# Altium PCB 20bit_40MS_ADC_DIOT.PcbDoc (part 4 of 8)
Units mm, origin at the board's own origin, x right, y up, seen from the top; angles counter-clockwise.
Board outline 222.63 x 100.1 mm, 6 copper layers (L1, L2, L3, L4, L5, L6), stack 2.522 mm thick; 616 components, 374 nets, 2097 pads, 984 vias.
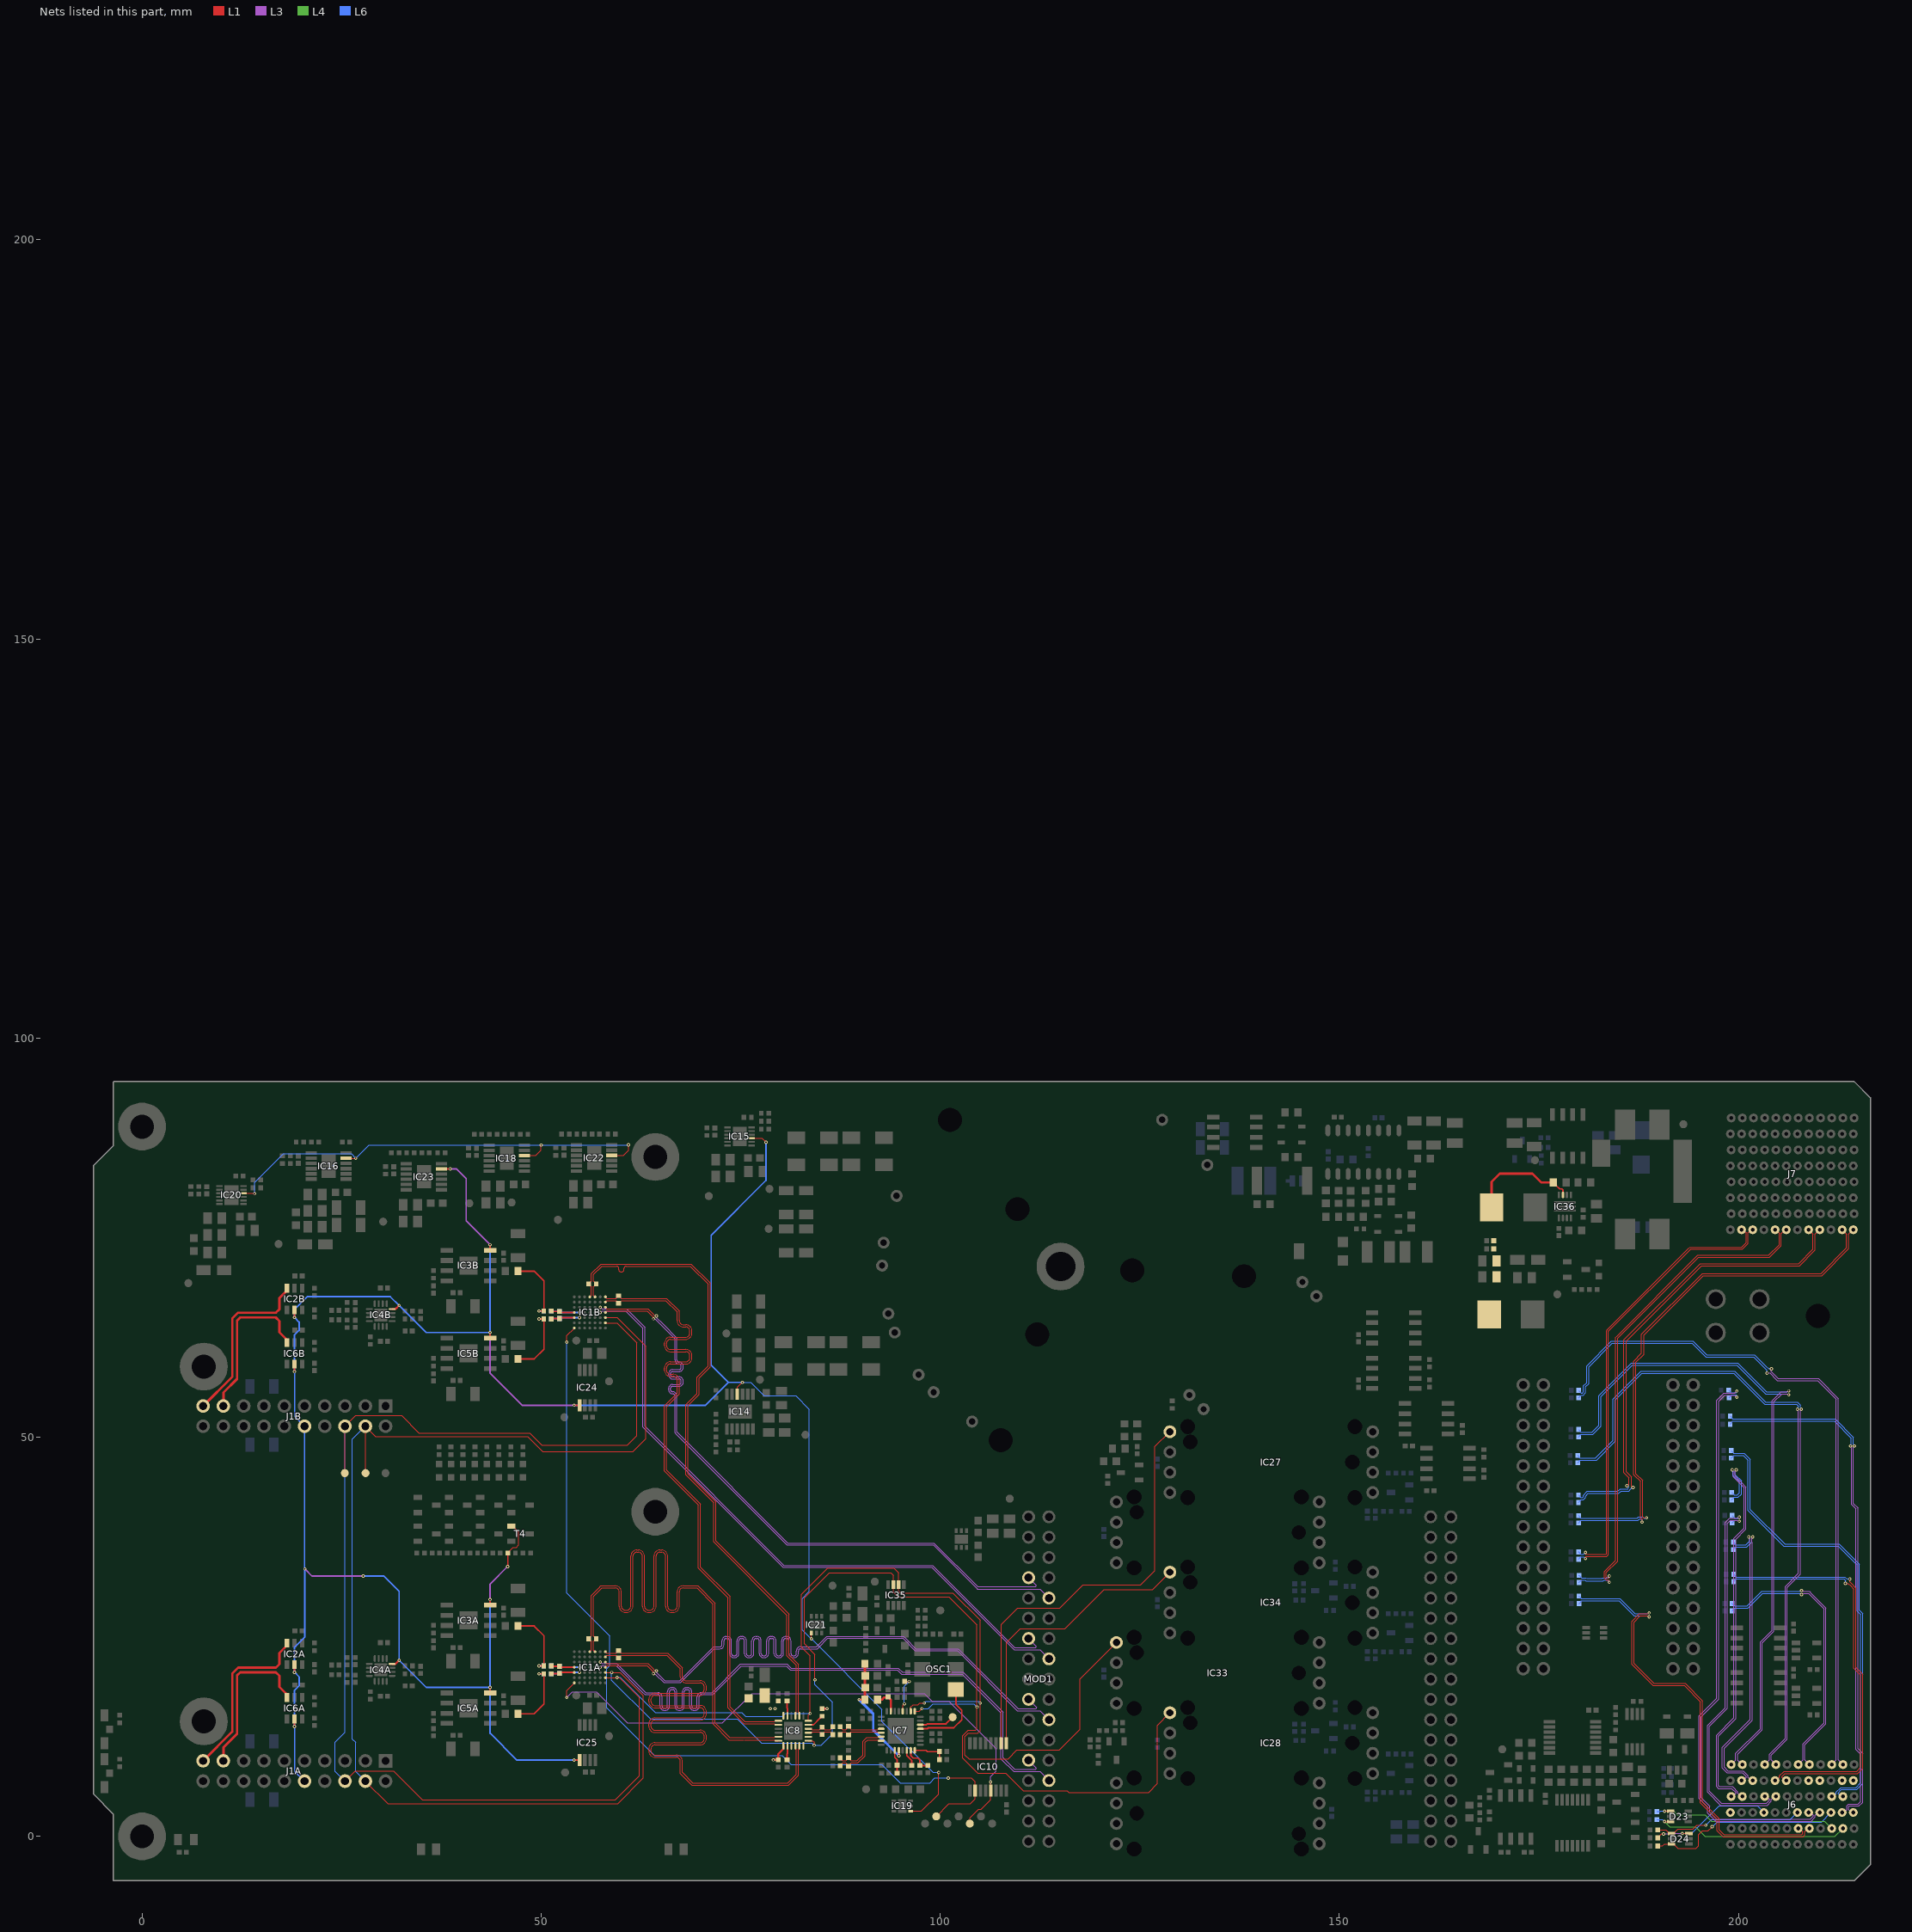
[diagram p7: the nets of this part, all layers, seen from the top]

## Part data (continued)
R128: library part R0603_49K9_1%_0.1W_100PPM, "Resistor - 1%", Case=0603, Manufacturer=GENERIC, Manufacturer1 ComponentHeight=0.55mm, Manufacturer1 Example=VISHAY, Manufacturer1 Part Number=CRCW060349K9FKEA, Power=0.1W, Tolerance=±1%, Author="CERN DEM JLC", Component Type=Standard, CreateDate=16.11.2017, HelpURL="\\cern.ch\dfs\Applications\Altium\Datasheets\R0603_VISHAY_CRCW e3.pdf", LatestRevisionDate=16.11.2017, Manufacturer Part Number=R0603_49K9_1%_0.1W_100PPM, Mounted=Yes, Part Description="General Purpose Thick Film Chip Resistor", Part Number=R0603_49K9_1%_0.1W_100PPM, Pin Count=2, PressFit=No, Sense=No, SMD=Yes, Socket=No, Status=Preferred, TC=±100ppm/°C
R129: library part R0603_150K_1%_0.1W_100PPM, "Resistor - 1%", Case=0603, Manufacturer=GENERIC, Manufacturer1 ComponentHeight=0.55mm, Manufacturer1 Example="NIC COMPONENT", Manufacturer1 Part Number=NRC06F1503TRF, Power=0.1W, Tolerance=±1%, Author="CERN DEM JLC", Component Type=Standard, CreateDate=03.12.2007, HelpURL=\\cern.ch\dfs\Applications\Altium\Datasheets\R0603_NIC_NRC.pdf, LatestRevisionDate=13.03.2008, Manufacturer Part Number=R0603_150K_1%_0.1W_100PPM, Mounted=Yes, Part Description="General Purpose Thick Film Chip Resistor", Part Number=R0603_150K_1%_0.1W_100PPM, Pin Count=2, PressFit=No, Sense=No, SMD=Yes, Socket=No, Status=Preferred, TC=±100ppm/°C
R130 R131 R133 R136 R138 R153: library part R0402_22R_1%_0.0625W_100PPM, "Resistor - 1%", Case=0402, Manufacturer=GENERIC, Manufacturer1 ComponentHeight=0.4mm, Manufacturer1 Example="YAGEO PHYCOMP", Manufacturer1 Part Number=232270672209L, Power=0.0625W, Tolerance=±1%, Author="CERN DEM JLC", Component Type=Standard, CreateDate=03.12.2007, HelpURL=\\cern.ch\dfs\Applications\Altium\Datasheets\R0402_Phycomp_RC0402.pdf, LatestRevisionDate=17.10.2012, Manufacturer Part Number=R0402_22R_1%_0.0625W_100PPM, Mounted=Yes, Part Description="General Purpose Thick Film Chip Resistor", Part Number=R0402_22R_1%_0.0625W_100PPM, Pin Count=2, PressFit=No, Sense=No, SMD=Yes, Socket=No, Status="Not Recommended"
  R153: TC=±100ppm/°C
R132: library part R0402_1K6_1%_0.0625W_100PPM, "Resistor - 1%", Case=0402, Manufacturer=GENERIC, Manufacturer1 ComponentHeight=0.4mm, Manufacturer1 Example="YAGEO PHYCOMP", Manufacturer1 Part Number=232270671602L, Power=0.0625W, Tolerance=±1%, Author="CERN DEM JLC", Component Type=Standard, CreateDate=03.12.2007, HelpURL=\\cern.ch\dfs\Applications\Altium\Datasheets\R0402_Phycomp_RC0402.pdf, LatestRevisionDate=17.10.2012, Manufacturer Part Number=R0402_1K6_1%_0.0625W_100PPM, Mounted=Yes, Part Description="General Purpose Thick Film Chip Resistor", Part Number=R0402_1K6_1%_0.0625W_100PPM, Pin Count=2, PressFit=No, Sense=No, SMD=Yes, Socket=No, Status="Not Recommended", TC=±100ppm/°C
R135 R137 R143 R144 R145 R146 R147 R148 R149 R150 R151 R152 R156 R157 R158 R159 R161 R162 R163 R164 R167 R168 R169 R170 R171 R172 R173 R174 R175 R176 R177 R181 R182 R186 R187 R188 R189 R190 R257 R260 R261 R262: library part R0402_0R_JUMPER, "Resistor", Case=0402, Manufacturer=GENERIC, Manufacturer1 ComponentHeight=0.4mm, Manufacturer1 Example="YAGEO PHYCOMP", Manufacturer1 Part Number=232270591001L, Author="CERN DEM JLC", Component Type=Standard, CreateDate=03.12.2007, HelpURL=\\cern.ch\dfs\Applications\Altium\Datasheets\R0402_Phycomp_RC0402.pdf, LatestRevisionDate=17.10.2012, Manufacturer Part Number=R0402_0R_JUMPER, Mounted=Yes, Part Description="1A (0.05R Max DC Resistance) Zero Ohm Jumper", Part Number=R0402_0R_JUMPER, Pin Count=2, Sense=No, SMD=Yes, Socket=No
  R135 R137: Status="Not recommended"
  R143 R144 R145 R146 R147 R148 R149 R150 R151 R152 R156 R157 R158 R159 R161 R162 R163 R164 R167 R168 R169 R170 R171 R172 R173 R174 R175 R176 R177 R181 R182 R186 R187 R188 R189 R190 R257 R260 R261 R262: PressFit=No, Status="Not Recommended"
R154: library part R0402_200R_1%_0.0625W_100PPM, "Resistor - 1%", Case=0402, Manufacturer=GENERIC, Manufacturer1 ComponentHeight=0.4mm, Manufacturer1 Example="YAGEO PHYCOMP", Manufacturer1 Part Number=232270672001L, Power=0.0625W, Tolerance=±1%, Author="CERN DEM JLC", Component Type=Standard, CreateDate=03.12.2007, HelpURL=\\cern.ch\dfs\Applications\Altium\Datasheets\R0402_Phycomp_RC0402.pdf, LatestRevisionDate=17.10.2012, Manufacturer Part Number=R0402_200R_1%_0.0625W_100PPM, Mounted=Yes, Part Description="General Purpose Thick Film Chip Resistor", Part Number=R0402_200R_1%_0.0625W_100PPM, Pin Count=2, PressFit=No, Sense=No, SMD=Yes, Socket=No, Status="Not Recommended", TC=±100ppm/°C
R192: library part R0402_2M_1%_0.0625W_100PPM, "Resistor - 1%", Case=0402, Manufacturer=GENERIC, Manufacturer1 ComponentHeight=0.4mm, Manufacturer1 Example="YAGEO PHYCOMP", Manufacturer1 Part Number=232270672005L, Power=0.0625W, Tolerance=±1%, Author="CERN DEM JLC", Component Type=Standard, CreateDate=12/3/2007, HelpURL=\\cern.ch\dfs\Applications\Altium\Datasheets\R0402_Phycomp_RC0402.pdf, LatestRevisionDate=10/17/2012, Manufacturer Part Number=R0402_2M_1%_0.0625W_100PPM, Mounted=Yes, Part Description="General Purpose Thick Film Chip Resistor", Part Number=R0402_2M_1%_0.0625W_100PPM, Pin Count=2, PressFit=No, Sense=No, SMD=Yes, Socket=No, Status="Not Recommended", TC=±100ppm/°C
SW1: library part JUMPSMD0805_G50, "2 SMD Pads for Bound by Solder  Drop", Manufacturer=None, Author="CERN DEM JLC", Component Type="Standard (No BOM)", ComponentHeight=0mm, CreateDate=8/26/2009, Family=Switch, HelpURL=None, LatestRevisionDate=2/12/2021, Manufacturer Part Number=None, Mounted=No, PackageDescription="2 SMD Pads for Bound by Solder Drop - Equivalent Size 0805 - Gap 0.5mm", Part Description="2 SMD Pads for Bound by Solder Drop - Equivalent Size 0805 - Gap 0.5mm", Part Number=JUMPSMD0805_G50, Pin Count=2, PressFit=No, Sense=No, SMD=No, Socket=No, Status=None
T1 T2 T19 T20: "N-CHANNEL MOSFET WITH DIODE", Case=SOT23-3, Manufacturer="ON SEMICONDUCTOR", Manufacturer Part Number=BSS138L, Author="CERN DEM JLC", Bonding=No, Component Type=Standard, ComponentHeight=1.11mm, CreateDate=23.03.2009, Device=BSS138LT1G, HelpURL=\\cern.ch\dfs\Applications\Altium\Datasheets\BSS138LT1G.pdf, LatestRevisionDate=25.05.2022, Mounted=Yes, PackageDescription="SOT23, 0.95mm Pitch; 3 Pin, 1.40mm W X 3.00mm L X 1.10mm H body, IPC Medium Density", Part Description="50V, 200mA N-Channel Enhancement Mode Field-Effect Transistor", Part Number=BSS138LT1G, Pin Count=3, PressFit=No, Sense=No, SMD=Yes, Socket=No
T3 T4 T5 T6 T8 T9 T10 T11 T12 T13 T14 T15 T16 T17 T18: "N-CHANNEL MOSFET WITH DIODE", Case=SOT23-3, Manufacturer="ON SEMICONDUCTOR", Author="CERN DEM JLC", Bonding=No, Component Type=Standard, ComponentHeight=1.11mm, CreateDate=23.03.2009, Device=BSS138LT1G, HelpURL=\\cern.ch\dfs\Applications\Altium\Datasheets\BSS138LT1G.pdf, LatestRevisionDate=23.03.2009, Manufacturer Part Number=BSS138LT1G, Mounted=Yes, PackageDescription="SOT23 3-Leads, Pitch 0.95mm - Body 1.4x3mm, IPC Medium Density", Part Description="50V 200mA N-Channel Enhancement Mode Field-Effect Transistor", Part Number=BSS138LT1G, Pin Count=3, PressFit=No, Sense=No, SMD=Yes, Socket=No
T7: "20V DUAL N-Channel 2.5V Specified PowerTrench MOSFET", Case=SOIC8, Manufacturer="FAIRCHILD SEMICONDUCTOR", Author="CERN DEM BC", Bonding=No, Component Type=Standard, ComponentHeight=1.75mm, CreateDate=9/2/2015, Device=FDS9926A, HelpURL=\\cern.ch\dfs\Applications\Altium\Datasheets\FDS9926A.pdf, LatestRevisionDate=9/2/2015, Manufacturer Part Number=FDS9926A, Mounted=Yes, PackageDescription="SOIC 8, Pitch 1.27mm - Body 4x5mm, IPC Medium Density", Part Description="20V, Dual N-Channel 2.5V Specified PowerTrench® MOSFET", Part Number=FDS9926A, Pin Count=8, PressFit=No, Sense=No, SMD=Yes, Socket=No
T21: library part Si4425DDY-T1-GE3, "-30V -19.7A P-Channel MOSFET", Case=SOIC8, Manufacturer="VISHAY SILICONIX", Author="CERN DEM MR", Bonding=No, Component Type=Standard, ComponentHeight=1.75mm, CreateDate=10/5/2016, Device=SI4425DDY-T1-GE3, HelpURL=\\cern.ch\dfs\Applications\Altium\Datasheets\SI4425DDY-T1-GE3.pdf, LatestRevisionDate=10/5/2016, Manufacturer Part Number=SI4425DDY-T1-GE3, Mounted=Yes, PackageDescription="SOIC 8, Pitch 1.27mm - Body 4x5mm, IPC Medium Density", Part Description="-30V -19.7A P-Channel MOSFET", Part Number=Si4425DDY-T1-GE3, Pin Count=8, PressFit=No, Sense=No, SMD=Yes, Socket=No
T22: "NPN Transistor", Case=SOT23-3, Manufacturer="NXP SEMICONDUCTORS", Author="CERN DEM JLC", Bonding=No, Component Type=Standard, ComponentHeight=1.1mm, CreateDate=14.06.2011, Device=BC847B, HelpURL=\\cern.ch\dfs\Applications\Altium\Datasheets\BC847B.pdf, LatestRevisionDate=14.06.2011, Manufacturer Part Number=BC847B, Mounted=Yes, PackageDescription="SOT23, 3 pin, Pitch 0.95mm - 1.3mm W X 2.9mm L X 1.1mm H, IPC Medium Density", Part Description="45V 100mA NPN general-purpose transistors", Part Number=BC847B, Pin Count=3, PressFit=No, Sense=No, SMD=Yes, Socket=No
Tr1: library part CORE_RTNC-40X25X15(M-083), "Toroidal Core with 5 Windings", Current=N/A, Manufacturer=Feryster, Author="Michal Beldyga", Component Type=Standard, ComponentHeight=15mm, CreateDate=2/14/2025, DC Resistance=N/A, LatestRevisionDate=2/14/2025, Manufacturer Part Number=RTNC-40X25X15(M-083), Part Description="40x25x15mm AL=99000 Nanoperm Core", Part Number=CORE_RTNC-40X25X15(M-083), Pin Count=10, SMD=No, Status=Active, Tolerance=N/A

## Via types
v1: diameter 0.4, hole 0.2, L1 to L6, tented both sides, 984 vias

## Nets (pads, with @x,y where several pads share a name; then routed paths per layer and width w, separated by ;. In a path a pad name is that pad's centre, name@x,y a point inside that pad or via, vN(x,y) a via of type N, cw(c..) or ccw(c..) an arc to the next point about the centre after c; other vN are vias at no path point)
3V3: C158.2 C159.2 C160.2 C161.2 IC36.6 L1.2 L9.1 R127.2 | length 14
  L1 w0.2: R127.2@176.8,81.85 177.15,81.5 177.2,81.5 177.6,81.1 177.883,81.1 178,80.983 IC36.6@178,80.35
  L1 w0.3: L1.2@169.075,78.8 169.075,81.975 170.1,83 174.2,83 175.3,81.9 R127.2@176.8,81.9
5V0_PG: IC16.5 IC18.4 IC20.4 IC22.4 | length 65.3
  L1 w0.125: IC20.4@12.7,80.55 14.05,80.55 v1(14.1,80.5) ; IC16.5@25.575,84.937 v1(26.763,84.937) ; IC18.4@47.893,85.275 49.338,85.275 49.993,85.931 v1@49.993,86.593 ; IC22.4@58.843,85.3 60.288,85.3 60.943,85.956 v1(60.943,86.618)
  L6 w0.125: v1(14.1,80.5) 14.1,81.9 17.7,85.5 26.2,85.5 v1(26.763,84.937) 28.425,86.6 56,86.6 ; v1(50,86.6) 50.018,86.618 v1(60.943,86.618)
AD9508_CLK_N: C26.1 IC8.22 R24.2 | length 3.6
  L1 w0.125: IC8.22@83.475,13.475 83.848,13.475 83.961,13.362 84.879,13.362 84.953,13.435 84.953,13.468 85.18,13.695 R24.2@85.2,13.695 ; R24.2@85.22,13.695 85.447,13.468 85.447,13.435 85.521,13.362 86.229,13.362 86.303,13.435 86.303,13.478 C26.1@86.55,13.725
AD9508_CLK_P: C27.1 IC8.21 R24.1 | length 3.6
  L1 w0.125: IC8.21@83.475,12.975 83.848,12.975 83.961,13.088 84.879,13.088 84.953,13.015 84.953,12.983 85.18,12.755 R24.1@85.2,12.755 ; R24.1@85.22,12.755 85.447,12.983 85.447,13.015 85.521,13.088 86.229,13.088 86.303,13.015 86.303,12.973 C27.1@86.55,12.725
AD9508_EXTCAP0: C40.2 IC8.5 | length 1.9
  L1 w0.2: C40.2@80.8,16.975 80.8,16.1 80.85,16.05 IC8.5@80.85,15.1
AD9508_EXTCAP1: C41.2 IC8.14 | length 1.8
  L1 w0.2: C41.2@80.8,9.575 80.8,10.3 80.85,10.35 IC8.14@80.85,11.35
AD9508_IN_SEL: IC8.23 R30.2 | length 2.2
  L1 w0.2: IC8.23@83.475,13.975 84.12,13.975 84.99,14.845 84.99,14.865 85.18,15.055 R30.2@85.2,15.055
AD9508_OUT0_N: IC1B.A5 IC8.3 R5B.2 | length 80.9
  L1 w0.125: IC1B.A5@56.75,67.575 56.562,67.763 56.562,68.879 56.635,68.953 56.668,68.953 56.895,69.18 R5B.2@56.895,69.2 56.895,69.22 56.668,69.447 56.635,69.447 56.562,69.521 56.562,70.375 57.613,71.426 58.7,71.426 59.44,71.426 cw(c59.44,71.155) 59.71,71.155 59.71,70.997 ccw(c59.981,70.997) 59.981,70.726 60.117,70.726 ccw(c60.117,70.997) 60.387,70.997 60.387,71.155 cw(c60.658,71.155) 60.658,71.426 61.5,71.426 68.674,71.426 70.9,69.2 70.9,58.9 69.5,57.5 69.5,55.487 68.1,54.087 68.1,45.3 71.626,41.774 71.626,36.874 80.8,27.7 80.8,22.6 81.963,21.437 81.963,16.569 81.963,15.586 81.85,15.473 IC8.3@81.85,15.1
AD9508_OUT0_P: IC1B.A4 IC8.2 R5B.1 | length 80.8
  L1 w0.125: IC1B.A4@56.1,67.575 56.288,67.763 56.288,68.879 56.215,68.953 56.182,68.953 55.955,69.18 R5B.1@55.955,69.2 55.955,69.22 56.182,69.447 56.215,69.447 56.288,69.521 56.288,70.488 57.5,71.7 68.787,71.7 71.174,69.313 71.174,58.787 69.774,57.387 69.774,55.374 68.374,53.974 68.374,45.413 71.9,41.887 71.9,36.987 81.074,27.813 81.074,22.713 82.237,21.55 82.237,16.456 82.237,15.586 82.35,15.473 IC8.2@82.35,15.1
AD9508_OUT1_N: IC1B.B7 IC8.8 R6B.1 | length 80.8
  L1 w0.125: IC1B.B7@58.05,66.925 58.238,67.113 59.379,67.113 59.453,67.04 59.453,67.008 59.68,66.78 R6B.1@59.7,66.78 59.72,66.78 59.947,67.008 59.947,67.04 60.021,67.113 65.6,67.113 67.026,65.687 67.026,64.8 67.026,64.601 ccw(c67.811,64.601) 67.811,63.816 68.115,63.816 cw(c68.115,63.305) 68.626,63.305 68.626,63.05 cw(c68.115,63.05) 68.115,62.539 66.211,62.539 ccw(c66.211,61.754) 65.426,61.754 65.426,61.499 ccw(c66.211,61.499) 66.211,60.714 68.115,60.714 cw(c68.115,60.203) 68.626,60.203 68.626,59.948 cw(c68.115,59.948) 68.115,59.437 66.211,59.437 ccw(c66.211,58.652) 65.426,58.652 65.426,58.397 ccw(c66.211,58.397) 66.211,57.612 66.515,57.612 cw(c66.515,57.101) 67.026,57.101 67.026,56.1 67.026,55.513 65.426,53.913 65.426,45.787 69.7,41.513 69.7,33.613 73.4,29.913 73.4,16.075 75.387,14.088 79.239,14.088 79.352,13.975 IC8.8@79.725,13.975
AD9508_OUT1_P: IC1B.A7 IC8.7 R6B.2 | length 80.8
  L1 w0.125: IC1B.A7@58.05,67.575 58.238,67.387 59.379,67.387 59.453,67.46 59.453,67.493 59.68,67.72 R6B.2@59.7,67.72 59.72,67.72 59.947,67.493 59.947,67.46 60.021,67.387 65.713,67.387 67.3,65.8 67.3,64.8 67.3,64.601 ccw(c67.811,64.601) 67.811,64.09 68.115,64.09 cw(c68.115,63.305) 68.9,63.305 68.9,63.05 cw(c68.115,63.05) 68.115,62.265 66.211,62.265 ccw(c66.211,61.754) 65.7,61.754 65.7,61.499 ccw(c66.211,61.499) 66.211,60.988 68.115,60.988 cw(c68.115,60.203) 68.9,60.203 68.9,59.948 cw(c68.115,59.948) 68.115,59.163 66.211,59.163 ccw(c66.211,58.652) 65.7,58.652 65.7,58.397 ccw(c66.211,58.397) 66.211,57.886 66.515,57.886 cw(c66.515,57.101) 67.3,57.101 67.3,56.1 67.3,55.4 65.7,53.8 65.7,45.9 69.974,41.626 69.974,33.726 73.674,30.026 73.674,16.188 75.5,14.362 79.239,14.362 79.352,14.475 IC8.7@79.725,14.475
AD9508_OUT2_N: IC1A.A5 IC8.12 R5A.2 | length 80.6
  L1 w0.125: IC1A.A5@56.75,23.125 56.562,23.313 56.562,24.429 56.635,24.502 56.668,24.502 56.895,24.73 R5A.2@56.895,24.75 56.895,24.77 56.668,24.997 56.635,24.997 56.562,25.071 56.562,30.062 57.258,30.758 57.6,31.1 59.303,31.1 cw(c59.303,30.629) 59.774,30.629 59.774,28.806 ccw(c60.519,28.806) 60.519,28.061 60.754,28.061 ccw(c60.754,28.806) 61.499,28.806 61.499,35.119 cw(c61.969,35.119) 61.969,35.59 62.205,35.59 cw(c62.205,35.119) 62.676,35.119 62.676,28.806 ccw(c63.42,28.806) 63.42,28.061 63.656,28.061 ccw(c63.656,28.806) 64.4,28.806 64.4,35.119 cw(c64.871,35.119) 64.871,35.59 65.107,35.59 cw(c65.107,35.119) 65.577,35.119 65.577,28.806 ccw(c66.322,28.806) 66.322,28.061 66.558,28.061 ccw(c66.558,28.806) 67.302,28.806 67.302,30.629 cw(c67.773,30.629) 67.773,31.1 67.972,31.1 69.5,31.1 71.5,29.1 71.5,14.113 73.525,12.088 75.387,12.088 ; 75.5,12.088 79.239,12.088 79.352,11.975 IC8.12@79.725,11.975
AD9508_OUT2_P: IC1A.A4 IC8.11 R5A.1 | length 81.1
  L1 w0.125: IC1A.A4@56.1,23.125 56.288,23.313 56.288,24.429 56.215,24.502 56.182,24.502 55.955,24.73 R5A.1@55.955,24.75 55.955,24.77 56.182,24.997 56.215,24.997 56.288,25.071 56.288,30.175 57.258,31.145 57.487,31.374 59.303,31.374 cw(c59.303,30.629) 60.048,30.629 60.048,28.806 ccw(c60.519,28.806) 60.519,28.335 60.754,28.335 ccw(c60.754,28.806) 61.225,28.806 61.225,35.119 cw(c61.969,35.119) 61.969,35.864 62.205,35.864 cw(c62.205,35.119) 62.95,35.119 62.95,28.806 ccw(c63.42,28.806) 63.42,28.335 63.656,28.335 ccw(c63.656,28.806) 64.127,28.806 64.127,35.119 cw(c64.871,35.119) 64.871,35.864 65.107,35.864 cw(c65.107,35.119) 65.851,35.119 65.851,28.806 ccw(c66.322,28.806) 66.322,28.335 66.558,28.335 ccw(c66.558,28.806) 67.028,28.806 67.028,30.629 cw(c67.773,30.629) 67.773,31.374 67.972,31.374 69.613,31.374 71.774,29.213 71.774,14.226 73.638,12.362 79.239,12.362 79.352,12.475 IC8.11@79.725,12.475
AD9508_OUT3_N: IC1A.B7 IC8.17 R6A.1 | length 81
  L1 w0.125: IC1A.B7@58.05,22.475 58.238,22.663 59.379,22.663 59.453,22.59 59.453,22.557 59.68,22.33 R6A.1@59.7,22.33 59.72,22.33 59.947,22.557 59.947,22.59 60.021,22.663 65.75,22.663 67.426,20.987 67.426,20.2 67.426,20.001 ccw(c68.211,20.001) 68.211,19.216 69.915,19.216 cw(c69.915,18.705) 70.426,18.705 70.426,18.45 cw(c69.915,18.45) 69.915,17.939 64.265,17.939 ccw(c64.265,17.154) 63.48,17.154 63.48,16.899 ccw(c64.265,16.899) 64.265,16.114 69.915,16.114 cw(c69.915,15.603) 70.426,15.603 70.426,15.348 cw(c69.915,15.348) 69.915,14.837 64.265,14.837 ccw(c64.265,14.052) 63.48,14.052 63.48,13.797 ccw(c64.265,13.797) 64.265,13.012 69.915,13.012 cw(c69.915,12.501) 70.426,12.501 70.426,12.246 cw(c69.915,12.246) 69.915,11.735 64.265,11.735 ccw(c64.265,10.951) 63.48,10.951 63.48,10.695 ccw(c64.265,10.695) 64.265,9.91 66.915,9.91 cw(c66.915,9.4) 67.426,9.4 67.426,8.4 67.426,7.887 68.887,6.426 81.013,6.426 82.237,7.65 82.237,10.864 82.35,10.977 IC8.17@82.35,11.35
AD9508_OUT3_P: IC1A.A7 IC8.16 R6A.2 | length 80.6
  L1 w0.125: IC1A.A7@58.05,23.125 58.238,22.937 59.379,22.937 59.453,23.01 59.453,23.043 59.68,23.27 R6A.2@59.7,23.27 59.72,23.27 59.947,23.043 59.947,23.01 60.021,22.937 65.863,22.937 67.7,21.1 67.7,20.2 67.7,20.001 ccw(c68.211,20.001) 68.211,19.49 69.915,19.49 cw(c69.915,18.705) 70.7,18.705 70.7,18.45 cw(c69.915,18.45) 69.915,17.665 64.265,17.665 ccw(c64.265,17.154) 63.754,17.154 63.754,16.899 ccw(c64.265,16.899) 64.265,16.388 69.915,16.388 cw(c69.915,15.603) 70.7,15.603 70.7,15.348 cw(c69.915,15.348) 69.915,14.563 64.265,14.563 ccw(c64.265,14.052) 63.754,14.052 63.754,13.797 ccw(c64.265,13.797) 64.265,13.286 69.915,13.286 cw(c69.915,12.501) 70.7,12.501 70.7,12.246 cw(c69.915,12.246) 69.915,11.461 64.265,11.461 ccw(c64.265,10.951) 63.754,10.951 63.754,10.695 ccw(c64.265,10.695) 64.265,10.184 66.915,10.184 cw(c66.915,9.4) 67.7,9.4 67.7,8.4 67.7,8 69,6.7 80.9,6.7 81.963,7.763 81.963,10.864 81.85,10.977 IC8.16@81.85,11.35
AD9508_PROG_SEL: IC8.15
AD9508_RESETn: IC8.18
AD9508_SYNCn: IC8.20
AD9508BCPZ_VDD: C36.1 C37.2 C38.2 IC8.6 IC8.13 L3.2 R30.1 | length 3.3
  L1 w0.25: C37.2@79.7,9.575 79.7,10.3 80.35,10.95 IC8.13@80.35,11.35
  L1 w0.3: v1(79.075,9.575) C37.2@79.7,9.575 ; R30.1@85.2,15.995 v1(85.825,15.995)
  other v1: 78.7,16 79.3,16
ADC_AUXINA_N: C4A.1 IC1A.E2 R4A.2 | length 3.7
  L6 w0.2: R4A.2@51.358,20.438 R4A.2@51.27,20.35 51.32,20.4 C4A.1@52.3,20.4 52.425,20.525 v1(54.8,20.525)
ADC_AUXINA_P: C4A.2 IC1A.D2 R1A.2 | length 3.7
  L6 w0.2: R1A.2@51.194,21.426 51.32,21.3 C4A.2@52.3,21.3 52.425,21.175 v1(54.8,21.175)
ADC_AUXINB_N: C4B.1 IC1B.E2 R4B.2 | length 3.7
  L6 w0.2: R4B.2@51.358,64.888 R4B.2@51.27,64.8 51.32,64.85 C4B.1@52.3,64.85 52.425,64.975 v1(54.8,64.975)
ADC_AUXINB_P: C4B.2 IC1B.D2 R1B.2 | length 3.7
  L6 w0.2: R1B.2@51.194,65.876 51.32,65.75 C4B.2@52.3,65.75 52.425,65.625 v1(54.8,65.625)
ADC_CSnA: B3A.1 IC1A.G1 IC10.13 | length 73.2
  L1 w0.125: v1@53.2,17.45 53.2,18.275 IC1A.G1@54.15,19.225 ; B3A.1@103.7,1.6 103.7,2.3 104.8,3.4 105.1,3.4 106.3,4.6 106.3,5.75 v1(106.3,6.8)
  L3 w0.125: v1(53.2,17.4) 53.9,18.1 56.9,18.1 60.8,14.2 72.7,14.2 76.4,17.9 98,17.9 99,16.9 101.1,16.9 107,11 107,8.2 106.3,7.5 v1(106.3,6.8)
ADC_CSnB: B3B.1 IC1B.G1 IC10.10 | length 108.8
  L1 w0.125: v1(53.2,61.9) 53.2,62.725 IC1B.G1@54.15,63.675 ; B3B.1@99.5,2.5 101.1,4.1 103.8,4.1 104.375,4.675 IC10.10@104.375,5.75 104.375,6.825 103.9,7.3 v1(101,7.3)
  L6 w0.125: v1(53.2,61.9) 53.2,30.5 58.6,25.1 58.6,21.4 58.2,21 58.2,16.1 64.2,10.1 80.2,10.1 81.3,9 92.7,9 95,6.7 98.7,6.7 99.3,7.3 v1(101,7.3)
ADC_DAA_N: IC1A.D7 MOD1.14 | length 83.3
  L1 w0.125: IC1A.D7@58.05,21.175 58.238,21.363 63.25,21.363 63.9,20.713 64.024,20.589 64.024,20.429 v1(64.076,20.376)
  L3 w0.13: v1(64.076,20.376) 64.128,20.325 64.306,20.325 65.379,19.251 67.451,19.251 67.597,19.397 71.7,23.5 72.2,23.5 72.39,23.5 ccw(c72.39,24.022) 72.911,24.022 72.911,24.503 cw(c73.184,24.503) 73.184,24.776 73.321,24.776 cw(c73.321,24.503) 73.593,24.503 73.593,22.909 ccw(c74.115,22.909) 74.115,22.387 74.252,22.387 ccw(c74.252,22.909) 74.773,22.909 74.773,24.503 cw(c75.046,24.503) 75.046,24.776 75.183,24.776 cw(c75.183,24.503) 75.455,24.503 75.455,22.909 ccw(c75.977,22.909) 75.977,22.387 76.114,22.387 ccw(c76.114,22.909) 76.635,22.909 76.635,24.503 cw(c76.908,24.503) 76.908,24.776 77.045,24.776 cw(c77.045,24.503) 77.317,24.503 77.317,22.909 ccw(c77.839,22.909) 77.839,22.387 77.976,22.387 ccw(c77.976,22.909) 78.497,22.909 78.497,24.503 cw(c78.77,24.503) 78.77,24.776 78.907,24.776 cw(c78.907,24.503) 79.179,24.503 79.179,22.909 ccw(c79.701,22.909) 79.701,22.387 79.838,22.387 ccw(c79.838,22.909) 80.359,22.909 80.359,24.503 cw(c80.632,24.503) 80.632,24.776 80.769,24.776 cw(c80.769,24.503) 81.041,24.503 81.041,22.909 ccw(c81.563,22.909) 81.563,22.387 81.7,22.387 ccw(c81.7,22.909) 82.222,22.909 82.222,23.227 cw(c82.494,23.227) 82.494,23.5 84,23.5 84.6,23.5 84.746,23.646 85.9,24.8 95.3,24.8 96.849,23.251 102.149,23.251 109.654,15.746 112.477,15.746 MOD1.14@113.608,14.615
ADC_DAA_P: IC1A.C7 MOD1.15 | length 82.8
  L1 w0.125: IC1A.C7@58.05,21.825 58.238,21.637 63.363,21.637 64.013,20.987 64.217,20.783 64.377,20.783 v1(64.43,20.73)
  L3 w0.13: v1(64.43,20.73) 64.482,20.678 64.482,20.501 65.482,19.5 67.348,19.5 71.597,23.749 72.2,23.749 72.39,23.749 ccw(c72.39,24.022) 72.662,24.022 72.662,24.503 cw(c73.184,24.503) 73.184,25.025 73.321,25.025 cw(c73.321,24.503) 73.842,24.503 73.842,22.909 ccw(c74.115,22.909) 74.115,22.636 74.252,22.636 ccw(c74.252,22.909) 74.524,22.909 74.524,24.503 cw(c75.046,24.503) 75.046,25.025 75.183,25.025 cw(c75.183,24.503) 75.704,24.503 75.704,22.909 ccw(c75.977,22.909) 75.977,22.636 76.114,22.636 ccw(c76.114,22.909) 76.386,22.909 76.386,24.503 cw(c76.908,24.503) 76.908,25.025 77.045,25.025 cw(c77.045,24.503) 77.566,24.503 77.566,22.909 ccw(c77.839,22.909) 77.839,22.636 77.976,22.636 ccw(c77.976,22.909) 78.248,22.909 78.248,24.503 cw(c78.77,24.503) 78.77,25.025 78.907,25.025 cw(c78.907,24.503) 79.428,24.503 79.428,22.909 ccw(c79.701,22.909) 79.701,22.636 79.838,22.636 ccw(c79.838,22.909) 80.11,22.909 80.11,24.503 cw(c80.632,24.503) 80.632,25.025 80.769,25.025 cw(c80.769,24.503) 81.29,24.503 81.29,22.909 ccw(c81.563,22.909) 81.563,22.636 81.7,22.636 ccw(c81.7,22.909) 81.972,22.909 81.972,23.227 cw(c82.494,23.227) 82.494,23.749 84,23.749 84.497,23.749 85.797,25.049 95.403,25.049 96.276,24.176 96.363,24.09 96.952,23.5 102.252,23.5 109.757,15.995 111.968,15.995 112.044,16.071 112.044,16.179 MOD1.15@111.068,17.155
ADC_DAB_N: IC1B.D7 MOD1.26 | length 82.2
  L1 w0.125: IC1B.D7@58.05,65.625 58.238,65.813 63.25,65.813 63.9,65.163 64.024,65.039 64.024,64.879 v1(64.076,64.826)
  L3 w0.13: v1(64.076,64.826) 64.128,64.775 64.306,64.775 64.955,64.125 64.955,64.124 66.751,62.328 66.751,61.1 66.751,59.682 ccw(c67.273,59.682) 67.273,59.16 67.278,59.16 cw(c67.278,58.887) 67.551,58.887 67.551,58.751 cw(c67.278,58.751) 67.278,58.478 66.473,58.478 ccw(c66.473,57.956) 65.951,57.956 65.951,57.82 ccw(c66.473,57.82) 66.473,57.298 67.278,57.298 cw(c67.278,57.025) 67.551,57.025 67.551,56.889 cw(c67.278,56.889) 67.278,56.616 66.473,56.616 ccw(c66.473,56.094) 65.951,56.094 65.951,55.958 ccw(c66.473,55.958) 66.473,55.436 66.478,55.436 cw(c66.478,55.163) 66.751,55.163 66.751,54.974 66.751,50.549 66.897,50.403 80.8,36.5 99.118,36.5 104.614,31.004 104.614,30.986 112.477,30.986 MOD1.26@113.608,29.855
ADC_DAB_P: IC1B.C7 MOD1.27 | length 81.7
  L1 w0.125: IC1B.C7@58.05,66.275 58.238,66.087 63.363,66.087 64.013,65.437 64.217,65.233 64.377,65.233 v1(64.43,65.18)
  L3 w0.13: v1(64.43,65.18) 64.482,65.128 64.482,64.951 65.204,64.228 65.204,64.227 67,62.431 67,61.1 67,59.682 ccw(c67.273,59.682) 67.273,59.409 67.278,59.409 cw(c67.278,58.887) 67.8,58.887 67.8,58.751 cw(c67.278,58.751) 67.278,58.229 66.473,58.229 ccw(c66.473,57.956) 66.2,57.956 66.2,57.82 ccw(c66.473,57.82) 66.473,57.547 67.278,57.547 cw(c67.278,57.025) 67.8,57.025 67.8,56.889 cw(c67.278,56.889) 67.278,56.367 66.473,56.367 ccw(c66.473,56.094) 66.2,56.094 66.2,55.958 ccw(c66.473,55.958) 66.473,55.685 66.478,55.685 cw(c66.478,55.163) 67,55.163 67,54.974 67,50.652 80.903,36.749 99.221,36.749 104.71,31.26 111.943,31.26 112.019,31.336 112.019,31.444 MOD1.27@111.068,32.395
ADC_DBA_N: IC1A.D6 MOD1.8 | length 80.8
  L3 w0.13: v1(57.4,21.175) 57.411,21.175 57.611,21.375 59.372,21.375 62.65,18.098 62.997,17.751 64.616,17.751 cw(c64.616,17.478) 64.889,17.478 64.889,16.307 ccw(c65.411,16.307) 65.411,15.785 65.547,15.785 ccw(c65.547,16.307) 66.069,16.307 66.069,18.103 cw(c66.342,18.103) 66.342,18.375 66.478,18.375 cw(c66.478,18.103) 66.751,18.103 66.751,16.307 ccw(c67.273,16.307) 67.273,15.785 67.409,15.785 ccw(c67.409,16.307) 67.931,16.307 67.931,18.103 cw(c68.204,18.103) 68.204,18.375 68.34,18.375 cw(c68.34,18.103) 68.613,18.103 68.613,16.307 ccw(c69.135,16.307) 69.135,15.785 69.271,15.785 ccw(c69.271,16.307) 69.793,16.307 69.793,17.478 cw(c70.066,17.478) 70.066,17.751 70.255,17.751 71.503,17.751 71.649,17.897 75.076,21.324 80.724,21.324 81.224,20.824 94.624,20.824 95.148,20.3 102.748,20.3 107.612,15.435 107.612,9.725 107.6,9.713 109.187,8.126 112.477,8.126 MOD1.8@113.608,6.995
ADC_DBA_P: IC1A.C6 MOD1.9 | length 80.2
  L3 w0.13: v1(57.4,21.825) 57.411,21.825 57.611,21.625 59.475,21.625 62.65,18.45 63.1,18 64.616,18 cw(c64.616,17.478) 65.138,17.478 65.138,16.307 ccw(c65.411,16.307) 65.411,16.034 65.547,16.034 ccw(c65.547,16.307) 65.82,16.307 65.82,18.103 cw(c66.342,18.103) 66.342,18.625 66.478,18.625 cw(c66.478,18.103) 67,18.103 67,16.307 ccw(c67.273,16.307) 67.273,16.034 67.409,16.034 ccw(c67.409,16.307) 67.682,16.307 67.682,18.103 cw(c68.204,18.103) 68.204,18.625 68.34,18.625 cw(c68.34,18.103) 68.862,18.103 68.862,16.307 ccw(c69.135,16.307) 69.135,16.034 69.271,16.034 ccw(c69.271,16.307) 69.544,16.307 69.544,17.478 cw(c70.066,17.478) 70.066,18 70.255,18 71.4,18 74.973,21.573 80.827,21.573 80.9,21.5 81.327,21.073 94.727,21.073 94.8,21 95.251,20.549 102.851,20.549 107.861,15.539 107.861,9.839 109.3,8.4 111.943,8.4 112.019,8.476 112.019,8.584 MOD1.9@111.068,9.535
ADC_DBB_N: IC1B.D6 MOD1.20 | length 81.7
  L3 w0.13: v1(57.4,65.625) 57.411,65.625 57.611,65.825 60.592,65.825 62.751,63.667 62.751,51.249 62.897,51.103 80.3,33.7 98.93,33.7 109.247,23.384 109.247,23.366 112.477,23.366 MOD1.20@113.608,22.235
  L6 w0.125: v1(57.4,65.625) v1@57.423,65.625
ADC_DBB_P: IC1B.C6 MOD1.21 | length 81.1
  L3 w0.13: v1(57.4,66.275) 57.411,66.275 57.611,66.075 60.695,66.075 63,63.77 63,51.352 80.403,33.949 99.033,33.949 109.342,23.64 111.943,23.64 112.019,23.716 112.019,23.824 MOD1.21@111.068,24.775
  L6 w0.125: v1(57.4,66.275) v1@57.423,66.275
ADC_INA_N: C3A.1 IC1A.E1 R3A.2 | length 3
  L1 w0.2: R3A.2@51.27,20.35 51.32,20.4 C3A.1@52.3,20.4 52.425,20.525 IC1A.E1@54.15,20.525
ADC_INA_P: C3A.2 IC1A.D1 R2A.2 | length 3
  L1 w0.2: R2A.2@51.27,21.35 51.32,21.3 C3A.2@52.3,21.3 52.425,21.175 IC1A.D1@54.15,21.175 ; IC1A.D1@54.109,21.15 IC1A.D1@54.15,21.15
ADC_INB_N: C3B.1 IC1B.E1 R3B.2 | length 3
  L1 w0.2: R3B.2@51.27,64.8 51.32,64.85 C3B.1@52.3,64.85 52.425,64.975 IC1B.E1@54.15,64.975
ADC_INB_P: C3B.2 IC1B.D1 R2B.2 | length 3
  L1 w0.2: R2B.2@51.27,65.8 51.32,65.75 C3B.2@52.3,65.75 52.425,65.625 IC1B.D1@54.15,65.625 ; IC1B.D1@54.109,65.6 IC1B.D1@54.15,65.6
ADC_SCLKA: B6.1 IC1A.E7 IC1B.E7 IC7.1 IC8.19 IC28.8 IC35.7 J1A.4 J1B.4 | length 302.1
  L1 w0.125: J1A.4@27.972,6.918 30.79,4.1 59.6,4.1 62.8,7.3 62.8,17.6 59.875,20.525 v1(58.831,20.525) IC1A.E7@58.05,20.525 ; B6.1@28,45.5 28,51.34 J1B.4@27.972,51.368 29.24,50.1 48.3,50.1 50.2,48.2 61.5,48.2 63.1,49.8 63.1,61.4 59.525,64.975 IC1B.E7@58.05,64.975 ; IC8.19@83.475,11.975 84.025,11.975 84.2,11.8 v1(84.2,11.4) ; v1(84.3,19.6) 84.3,22.8 83,24.1 83,29.9 86.1,33 93.8,33 94.125,32.675 IC35.7@94.125,31.525 94.125,30.575 94.7,30 101.1,30 104.6,26.5 v1(104.6,16.2) 104.6,13.5 104.4,13.3 103.5,13.3 102.8,12.6 102.8,9.8 104.7,7.9 108.2,7.9 110.4,5.7 115.9,5.7 116.1,5.5 126.1,5.5 127.2,6.6 127.2,13.917 IC28.8@128.768,15.485 ; IC7.1@96.8,15.675 97.375,15.675 v1(97.7,16)
  L6 w0.125: J1A.4@27.972,6.918 26.74,8.15 26.74,11.8 26.35,12.19 26.35,49.746 J1B.4@27.972,51.368 ; v1(58.831,20.525) 58.831,19.569 63.7,14.7 74.6,14.7 77.6,11.7 83.9,11.7 v1(84.2,11.4) 85.1,11.4 86.5,12.8 86.5,16.8 84.3,19 v1(84.3,19.6) ; v1(97.7,16) 98.5,16 99.1,16.6 104.189,16.6 104.589,16.2 v1(104.6,16.2)
ADC_SDIA: B7.1 IC1A.F7 IC1B.F7 IC7.2 IC8.24 IC33.8 IC35.6 J1A.6 J1B.6 | length 289.8
  L1 w0.125: B7.1@25.4,45.5 25.432,45.532 J1B.6@25.432,51.368 26.764,52.7 32.5,52.7 34.7,50.5 48.6,50.5 50.1,49 60.8,49 62,50.2 62,61.825 59.5,64.325 IC1B.F7@58.05,64.325 ; J1A.6@25.432,6.918 26.714,8.2 31.5,8.2 35.1,4.6 59.3,4.6 62.3,7.6 62.3,17.4 59.825,19.875 59.525,19.875 v1(59.5,19.9) 59.475,19.875 IC1A.F7@58.05,19.875 ; IC8.24@83.475,14.475 83.475,15.175 v1(83.7,15.4) 83.7,22.6 82.6,23.7 82.6,30.3 85.9,33.6 94.2,33.6 94.775,33.025 IC35.6@94.775,31.525 94.775,30.725 95,30.5 101.566,30.5 105,27.066 v1(105,16.7) 105,13.2 104.7,12.9 103.5,12.9 103.1,12.5 103.1,10.2 103.6,9.7 108.5,9.7 109.6,10.8 114.9,10.8 117.5,13.4 117.5,19.717 IC33.8@122.068,24.285 ; IC7.2@96.3,15.675 96.3,16.2 96.6,16.5 97.2,16.5 97.4,16.7 v1(98,16.7)
  L6 w0.125: J1A.6@25.432,6.918 24.2,8.15 24.2,11.8 25.432,13.032 J1B.6@25.432,51.368 ; v1(59.5,19.9) 59.9,19.9 64.3,15.5 75.1,15.5 75.6,15 80.2,15 80.6,15.4 v1(83.7,15.4) ; v1(98,16.7) 98.011,16.7 98.211,16.9 104.789,16.9 104.989,16.7 v1(105,16.7)
ADCINA_N: R3A.1 R4A.1 R16A.2 | length 8.8
  L1 w0.2: R16A.2@47.1,15.35 49.129,15.35 50.359,16.58 50.359,20.35 v1(49.729,20.35)
  L6 w0.2: v1(49.729,20.35) R4A.1@50.359,20.35
ADCINA_P: R1A.1 R2A.1 R8A.2 | length 8.8
  L1 w0.2: R8A.2@47.1,26.35 49.129,26.35 50.359,25.12 50.359,21.35 v1(49.729,21.35)
  L6 w0.2: v1(49.729,21.35) R1A.1@50.359,21.35
ADCINB_N: R3B.1 R4B.1 R16B.2 | length 8.8
  L1 w0.2: R16B.2@47.1,59.8 49.129,59.8 50.359,61.03 50.359,64.8 v1(49.729,64.8)
  L6 w0.2: v1(49.729,64.8) R4B.1@50.359,64.8
ADCINB_P: R1B.1 R2B.1 R8B.2 | length 8.8
  L1 w0.2: R8B.2@47.1,70.8 49.129,70.8 50.359,69.57 50.359,65.8 v1(49.729,65.8)
  L6 w0.2: v1(49.729,65.8) R1B.1@50.359,65.8
ADF4350_CPOUT: C30.2 IC7.7 R21.1 | length 3.4
  L1 w0.3: R21.1@92.15,17.125 92.701,17.125 92.976,17.4 93.375,17.4 C30.2@93.45,17.475 93.8,17.125 IC7.7@93.8,15.675
ADF4350_EN: IC7.4 R20.1 | length 4.6
  L1 w0.125: IC7.4@95.3,15.675 95.3,16.4 v1(95.5,16.6) ; R20.1@95.52,19.425 95.545,19.4 v1(96.1,19.4)
  L6 w0.125: v1(95.5,16.6) 95.5,18.8 v1(96.1,19.4)
ADF4350_MUXOUT: B2.1 IC7.30 | length 4.4
  L1 w0.2: IC7.30@97.5,13.975 98.275,13.975 98.4,14.1 100.725,14.1 B2.1@101.55,14.925
ADF4350_OUTA_N: C27.2 IC7.13 L4.1 | length 5.8
  L1 w0.125: C27.2@87.45,12.725 87.698,12.973 87.698,13.015 87.771,13.088 88.179,13.088 88.253,13.015 88.253,12.923 88.49,12.685 L4.1@88.5,12.685 88.51,12.685 88.748,12.923 88.748,13.015 88.821,13.088 89.247,13.088 ; 89.247,13.088 92.165,13.088 92.278,12.975 IC7.13@92.6,12.975
ADF4350_OUTA_P: C26.2 IC7.12 L2.1 | length 5.8
  L1 w0.125: C26.2@87.45,13.725 87.698,13.478 87.698,13.435 87.771,13.362 88.179,13.362 88.253,13.435 88.253,13.528 88.49,13.765 L2.1@88.5,13.765 88.51,13.765 88.748,13.528 88.748,13.435 88.821,13.362 89.361,13.362 92.165,13.362 92.278,13.475 IC7.12@92.6,13.475
ADF4350_OUTB_N: C29.2 IC7.15 L6.1 | length 8
  L1 w0.125: C29.2@87.45,8.825 87.698,9.073 87.698,9.115 87.771,9.188 88.179,9.188 88.253,9.115 88.253,9.023 88.49,8.785 L6.1@88.5,8.785 88.51,8.785 88.748,9.023 88.748,9.115 88.821,9.188 89.111,9.188 89.675,9.188 90.574,10.087 90.574,11.774 90.888,12.088 92.165,12.088 92.278,11.975 IC7.15@92.6,11.975
ADF4350_OUTB_P: C28.2 IC7.14 L5.1 | length 8.1
  L1 w0.125: C28.2@87.45,9.825 87.698,9.578 87.698,9.535 87.771,9.462 88.179,9.462 88.253,9.535 88.253,9.628 88.49,9.865 L5.1@88.5,9.865 88.51,9.865 88.748,9.628 88.748,9.535 88.821,9.462 88.998,9.462 89.562,9.462 90.3,10.2 90.3,11.887 90.775,12.362 91.944,12.362 ; 91.837,12.362 91.944,12.362 ; IC7.14@92.6,12.475 92.278,12.475 92.165,12.362 91.944,12.362
ADF4350_REFIN: IC7.29 OSC1.4 | length 9.8
  L1 w0.2: IC7.29@97.5,13.475 98.375,13.475 98.5,13.6 101.7,13.6 102.7,14.6 102.7,15.8 101.95,16.55 OSC1.4@101.95,18.385
ADF4350_RSET: IC7.22 R23.2 | length 2.1
  L1 w0.2: IC7.22@95.8,10.775 95.8,10.1 96.43,9.47 R23.2@96.43,8.895
ADF4350_TEMP: C54.2 C55.2 IC7.19 | length 3
  L1 w0.2: IC7.19@94.3,10.775 94.3,9.9 94.58,9.62 C55.2@94.58,8.925 C54.2@94.58,7.925
ADF4350_VCOM: C50.2 C51.2 IC7.23 | length 3.7
  L1 w0.2: IC7.23@96.3,10.775 96.3,10.1 96.6,9.8 97.2,9.8 97.45,9.55 C51.2@97.45,8.875 C50.2@98.45,8.875
ADF4350_VREF: C52.2 C53.2 IC7.24 | length 4.2
  L1 w0.2: IC7.24@96.8,10.775 98.225,10.775 98.4,10.6 99.875,10.6 C53.2@99.9,10.625 C52.2@99.9,9.625
ADF4350_VTUNE: C45.2 C46.2 IC7.20 R21.2 R22.2 | length 15
  L1 w0.2: v1(94.8,10.1) IC7.20@94.8,10.775
  L1 w0.3: v1(89.825,17.125) R21.2@90.55,17.125 R22.2@90.55,21.625
  L6 w0.3: v1(89.825,17.125) 91.6,15.35 91.6,13.3 v1(94.8,10.1)
AFE_EN: IC2A.5 IC2B.5 IC3A.8 IC3B.8 IC4A.12 IC4B.12 IC5A.8 IC5B.8 IC6A.5 IC6B.5 IC14.4 IC15.3 IC19.4 IC21.4 IC23.5 IC24.1 IC25.1 J1A.10 J1B.10 R55.1 T4.1 | length 345.5
  L1 w0.125: R55.1@45.83,35.5 46.057,35.728 46.057,35.758 46.5,36.2 46.9,36.2 47.2,36.5 47.2,38.1 46.712,38.588 46.512,38.588 T4.1@46.25,38.85 ; IC14.4@74.601,55.411 74.601,56.264 v1(75.199,56.862) ; IC15.3@76.368,87.45 77.668,87.45 v1(78.168,86.95) ; v1(83.85,24.75) IC21.4@83.85,25.45 ; IC19.4@96.3,3.15 97.65,3.15 99.8,5.3 v1(99.8,8)
  L1 w0.2: v1(19.1,13.75) IC6A.5@19.1,14.7 ; v1(19.1,20.55) IC2A.5@19.1,21.5 ; v1(19.1,58.2) IC6B.5@19.1,59.15 ; v1(19.1,65) IC2B.5@19.1,65.95 ; IC23.5@37.518,83.6 v1(38.6,83.6) ; IC5A.8@43.6,17.955 v1(43.6,18.658) ; IC3A.8@43.6,28.955 v1(43.6,29.658) ; IC5B.8@43.6,62.405 v1(43.6,63.108) ; IC3B.8@43.6,73.405 v1(43.6,74.108) ; v1@45.83,33.83 R55.1@45.83,35.5 ; v1(54.122,9.55) IC25.1@54.825,9.55 ; v1(54.122,54) IC24.1@54.825,54
  L1 w0.25: IC4A.12@31.325,21.6 31.75,21.6 v1(32.2,22.05) ; IC4B.12@31.325,66.05 31.75,66.05 v1(32.2,66.5)
  L3 w0.2: v1(20.4,33.5) 21.3,32.6 v1(27.7,32.6) ; v1(38.6,83.6) 39.4,83.6 40.6,82.4 40.6,77.108 v1(43.6,74.108) ; v1(43.6,29.658) 43.6,31.6 v1(45.8,33.8) ; v1(43.6,63.108) 43.6,58 47.6,54 v1(54.122,54)
  L6 w0.125: v1(75.199,56.862) 76.238,56.862 77.9,55.2 81.9,55.2 83.6,53.5 83.6,30.7 82.7,29.8 82.7,25.826 83.776,24.75 v1(83.85,24.75) 92.7,15.9 92.7,14.4 99.1,8 v1(99.8,8)
  L6 w0.2: v1@19.08,58.22 19.08,62.77 19.68,63.37 19.68,64.42 v1(19.1,65) ; v1@19.08,65.02 v1(19.1,65) ; v1@19.12,58.18 19.12,52.6 J1B.10@20.352,51.368 20.352,33.602 20.4,33.554 v1(20.4,33.5) 20.4,25 19.1,23.7 v1(19.1,20.55) 19.7,19.95 19.7,18.9 19.1,18.3 v1(19.1,13.75) 19.12,13.73 19.12,8.15 J1A.10@20.352,6.918 ; v1(27.7,32.6) 30.3,32.6 32.2,30.7 v1(32.2,22.05) 35.592,18.658 v1(43.6,18.658) ; v1(43.6,29.658) v1(43.6,18.658) ; v1(43.6,74.108) v1(43.6,63.108) 35.592,63.108 v1(32.2,66.5) 31.1,67.6 20.7,67.6 19.1,66 v1(19.1,65) ; v1(54.122,9.55) 46.95,9.55 43.6,12.9 v1(43.6,18.658) ; v1(54.122,54) 70.6,54 73.462,56.862 ; v1(75.199,56.862) 73.462,56.862 ; v1(78.168,86.95) 78.168,82.168 71.3,75.3 71.3,59.024 73.462,56.862
AFE_INA_N: IC6A.3 J1A.17 | length 20.2
  L1 w0.3: J1A.17@10.192,9.458 10.192,11.142 11.9,12.85 11.9,20.15 12.3,20.55 16.75,20.55 17.2,20.1 17.2,18.7 18.062,17.838 18.107,17.838 18.232,17.713 IC6A.3@18.232,17.438
AFE_INA_P: IC2A.3 J1A.19 | length 22
  L1 w0.3: J1A.19@7.652,9.458 11.3,13.106 11.3,20.4 12.05,21.15 16.774,21.15 17.2,21.576 17.2,22.976 18.062,23.838 18.107,23.838 18.232,23.963 IC2A.3@18.232,24.238
AFE_INB_N: IC6B.3 J1B.17 | length 20.2
  L1 w0.3: J1B.17@10.192,53.908 10.192,55.592 11.9,57.3 11.9,64.6 12.3,65 16.75,65 17.2,64.55 17.2,63.15 18.062,62.288 18.107,62.288 18.232,62.163 IC6B.3@18.232,61.888
AFE_INB_P: IC2B.3 J1B.19 | length 22
  L1 w0.3: J1B.19@7.652,53.908 11.3,57.556 11.3,64.85 12.05,65.6 16.774,65.6 17.2,66.026 17.2,67.426 18.062,68.288 18.107,68.288 18.232,68.413 IC2B.3@18.232,68.688
BGA0: D24.3 J6.C3 R130.2 | length 24.7
  L1 w0.125: R130.2@189.87,-1.2 190.5,-1.2 190.75,-0.95 D24.3@191.6,-0.95 191.875,-0.95 192.012,-1.087 192.012,-1.112 192.4,-1.5 194.7,-1.5 195,-1.2 195,0.2 195.5,0.7 196.2,0.7 v1(196.7,1.2)
  L6 w0.125: v1(196.7,1.2) 197.3,1.8 210.395,1.8 J6.C3@211.583,2.988
BGA1: D24.1 J6.F3 R131.2 | length 18.8
  L1 w0.125: R131.2@189.87,0.8 190.9,0.8 191.188,0.512 191.188,0.487 191.325,0.35 D24.1@191.6,0.35 191.875,0.35 192.012,0.487 192.012,0.513 192.4,0.9 194.3,0.9 194.8,1.4 v1(195.9,1.4)
  L6 w0.125: v1(195.9,1.4) 196.6,2.1 206.495,2.1 J6.F3@207.383,2.988
BGA2: D24.6 J6.I3 R136.2 | length 16.2
  L1 w0.125: R136.2@189.87,-0.2 189.87,-0.18 190.097,0.047 190.117,0.047 190.37,0.3 v1(190.6,0.3) ; v1(192.95,0.35) D24.6@193.8,0.35
  L3 w0.125: v1(190.6,0.3) 191.4,0.3 191.45,0.35 v1(192.95,0.35)
  L6 w0.125: v1(192.95,0.35) 194.15,0.35 197.6,3.8 202.371,3.8 J6.I3@203.183,2.988
BGA3: J6.L3
BP_I2C.SCL: D23.3 J6.B2 R187.1 | length 25.4
  L1 w0.125: v1(190.75,1.85) D23.3@191.6,1.85
  L4 w0.125: v1(190.75,1.85) 191.4,1.2 194.6,1.2 195.8,0 212.095,0 J6.B2@213.083,0.988
  L6 w0.125: R187.1@189.77,2.1 190.5,2.1 v1(190.75,1.85)
BP_I2C.SDA: D23.1 J6.C2 R186.1 | length 23.7
  L1 w0.125: v1(190.75,3.15) D23.1@191.6,3.15
  L4 w0.125: v1(190.75,3.15) 191.85,3.15 192.3,2.7 195.8,2.7 196.6,1.9 210.771,1.9 J6.C2@211.683,0.988
  L6 w0.125: R186.1@189.77,3.1 190.2,3.1 190.25,3.15 v1(190.75,3.15)
BP_IO.LVDS_N0: J6.E3 R161.1 | length 71.2
  L3 w0.13: v1(199.785,55.004) 199.522,55.267 198.303,55.267 197.519,54.484 197.519,17.189 195.314,14.984 195.314,4.828 196.389,3.754 196.389,3.02 197.266,2.143 208.991,2.143 209.358,2.51 209.358,2.618 208.988,2.988 J6.E3@208.783,2.988
  L6 w0.125: R161.1@198.833,54.928 199.06,55.155 199.06,55.213 199.133,55.286 199.68,55.286 199.785,55.181 v1(199.785,55.004)
BP_IO.LVDS_N1: J6.B3 R162.1 | length 65.5
  L3 w0.13: J6.B3@212.983,2.988 213.188,2.988 213.558,3.359 213.558,3.569 213.558,3.803 213.804,4.049 215,4.049 215.3,4.349 215.3,10.3 214.727,10.873 214.727,41.021 214.151,41.597 214.151,48.701 214.025,48.827 v1(214.025,48.9)
  L6 w0.125: R162.1@198.96,51.626 199.187,51.853 199.187,51.923 199.26,51.997 212.003,51.997 214.139,49.861 214.139,49.087 214.025,48.974 v1(214.025,48.9)
BP_IO.LVDS_N2: J6.C4 R163.1 | length 57.2
  L6 w0.125: R163.1@199.112,47.384 199.339,47.611 199.339,47.649 199.413,47.722 199.817,47.722 199.823,47.717 200.6,47.717 201.2,47.117 201.2,40.813 205.687,36.326 212.521,36.326 214.426,34.42 214.443,34.42 ; J6.C4@211.683,4.988 211.894,4.988 212.258,5.353 212.258,5.56 212.799,6.101 214.69,6.101 215.328,6.738 215.328,27.776 214.872,28.231 214.872,34.008 214.452,34.429
BP_IO.LVDS_N3: J6.L4 R164.1 | length 49.7
  L3 w0.13: J6.L4@199.083,4.988 199.288,4.988 199.658,5.359 199.658,5.466 199.143,5.982 197.493,5.982 197.25,6.225 197.25,12.674 199.419,14.843 199.419,37.304 200.7,38.585 200.7,43.648 199.339,45.009 199.339,45.701 199.213,45.827 v1(199.213,45.9)
  L6 w0.125: R164.1@199.163,43.071 199.39,42.844 199.39,42.821 199.464,42.748 199.848,42.748 200.1,43 200.1,44.4 199.326,45.174 199.326,45.8 199.226,45.9 v1(199.213,45.9)
BP_IO.LVDS_N4: J6.I4 R167.1 | length 46.4
  L3 w0.13: v1(200.1,39.475) 200.1,39.5 200,39.6 199,39.6 198.586,39.186 198.586,16.021 196.356,13.79 196.356,5.638 197.851,4.143 203.491,4.143 203.858,4.51 203.858,4.618 203.488,4.988 J6.I4@203.283,4.988
  L6 w0.125: R167.1@199.214,39.256 199.441,39.483 199.441,39.516 199.514,39.589 199.911,39.589 200.026,39.475 v1(200.1,39.475)
BP_IO.LVDS_N5: J6.K5 R168.1 | length 37.7
  L3 w0.13: J6.K5@200.383,6.988 200.588,6.988 200.958,7.359 200.958,7.466 200.473,7.952 198.572,7.952 197.961,8.562 197.961,11.15 201.479,14.668 201.479,36.646 201.415,36.71 201.415,37.294 201.286,37.423 v1(201.286,37.496)
  L6 w0.125: R168.1@199.341,36.868 199.568,36.641 199.568,36.608 199.641,36.535 200.935,36.535 201.4,37 201.4,37.4 201.304,37.496 v1(201.286,37.496)
BP_IO.LVDS_N6: J6.H5 R169.1 | length 50.2
  L1 w0.125: J6.H5@204.583,6.988 204.77,6.988 205.146,7.365 205.146,7.582 205.713,8.148 214.821,8.148 215.316,8.643 215.316,20.197 214.46,21.053 214.46,30.98 214.042,31.399 213.754,31.687 v1(213.399,31.687)
  L6 w0.125: R169.1@199.391,31.91 199.619,32.137 199.619,32.166 199.692,32.24 213.218,32.24 213.399,32.058 v1(213.399,31.687)
BP_IO.LVDS_N7: J6.F6 R170.1 | length 34.3
  L3 w0.13: J6.F6@207.483,8.988 208.058,9.564 208.058,11.558 208.204,11.704 210.7,14.2 210.7,28.5 208.775,30.425 208.099,30.425 207.973,30.3 v1(207.9,30.3)
  L6 w0.125: R170.1@199.214,28.232 199.441,28.46 199.441,28.504 199.514,28.577 ; R170.1@199.434,28.497 199.514,28.577 ; v1(207.9,30.3) 207.826,30.3 207.713,30.413 203.013,30.413 201.177,28.577 199.514,28.577
BP_IO.LVDS_N8: J6.C6 R171.1 | length 85.9
  L3 w0.13: v1(203.57,58.026) 203.942,58.026 204.716,57.252 204.868,57.1 209.9,57.1 212.258,54.742 212.258,9.564 J6.C6@211.683,8.988
  L6 w0.125: R171.1@179.986,54.928 180.213,55.155 180.213,55.187 180.287,55.261 180.552,55.261 180.862,55.571 180.862,56.33 181.255,56.724 181.255,58.819 184.184,61.748 194.185,61.748 195.893,60.04 201.911,60.04 203.139,58.811 203.57,58.381 v1(203.57,58.026)
BP_IO.LVDS_N9: J6.L6 R172.1 | length 84.1
  L3 w0.13: J6.L6@199.083,8.988 199.646,9.551 199.646,10.389 202.744,13.487 202.744,24.344 204.2,25.8 204.2,54.552 205.322,55.675 206.101,55.675 206.227,55.8 v1(206.3,55.8)
  L6 w0.125: R172.1@179.96,50.965 180.188,50.738 180.188,50.705 180.261,50.632 181.632,50.632 182.5,51.5 182.5,55.2 186.574,59.274 199.913,59.274 203.5,55.687 206.113,55.687 206.226,55.8 v1(206.3,55.8)
BP_IO.LVDS_N10: J6.I6 R173.1 | length 83.8
  L3 w0.13: J6.I6@203.283,8.988 203.858,9.564 203.858,10.303 205.851,12.296 205.851,31.303 207.5,32.952 207.5,53.4 207.4,53.5 v1(207.375,53.5)
  L6 w0.125: R173.1@179.859,46.8 180.086,47.027 180.086,47.052 180.16,47.125 182.213,47.125 184.574,49.487 184.574,54.674 187.9,58 199.413,58 203.287,54.126 207.287,54.126 207.488,53.925 207.488,53.687 207.375,53.574 v1(207.375,53.5)
BP_IO.LVDS_N11: J7.E1 R174.1 | length 57.2
  L1 w0.125: v1(186.036,43.916) 186.11,43.916 186.218,44.024 186.225,44.024 186.299,44.098 186.299,44.908 185.655,45.551 185.655,62.172 195.238,71.755 207.538,71.755 209.338,73.555 209.338,74.892 209.346,74.9 209.346,75.425 J7.E1@208.783,75.988
  L6 w0.125: R174.1@179.948,42.761 180.175,42.534 180.175,42.501 180.249,42.428 180.445,42.428 180.55,42.534 180.55,42.725 181.052,43.227 184.891,43.227 185.188,43.524 186.166,43.524 186.243,43.602 186.243,43.705 186.036,43.913 v1(186.036,43.916)
BP_IO.LVDS_N12: J7.B1 R175.1 | length 65.6
  L1 w0.125: v1(187.923,39.357) 187.923,39.712 187.724,39.911 187.724,44.459 186.874,45.309 186.874,59.517 187.863,60.505 187.863,62.893 195.48,70.51 210.331,70.51 213.538,73.717 213.538,74.892 213.546,74.9 213.546,75.425 J7.B1@212.983,75.988
  L6 w0.125: R175.1@179.96,39.256 179.96,39.276 180.261,39.576 187.417,39.576 187.586,39.745 187.89,39.745 187.963,39.672 187.963,39.397 v1(187.923,39.357)
BP_IO.LVDS_N13: J7.K1 R176.1 | length 56.1
  L1 w0.125: v1(180.837,35.573) 180.837,35.384 180.91,35.31 183.379,35.31 183.453,35.384 183.453,63.353 183.599,63.499 193.754,73.654 193.9,73.8 200.4,73.8 200.958,74.358 200.958,75.417 200.958,75.624 200.594,75.988 J7.K1@200.383,75.988
  L6 w0.125: R176.1@180.011,35.573 R176.1@179.96,35.624 179.96,35.604 180.261,35.303 180.567,35.303 v1(180.837,35.573)
BP_IO.LVDS_N14: J7.H1 R177.1 | length 63.3
  L1 w0.125: v1(183.808,31.826) 183.808,32.015 183.735,32.089 183.455,32.089 183.196,32.347 183.196,33.152 184.6,34.556 184.6,62.5 184.747,62.647 194.754,72.654 194.9,72.8 203.8,72.8 205.1,74.1 205.1,75.566 204.742,75.923 204.742,75.988 J7.H1@204.583,75.988
  L6 w0.125: R177.1@179.986,31.808 R177.1@180.028,31.808 ; R177.1@180.04,31.8 180.04,31.82 180.333,32.113 180.773,32.113 180.876,32.01 183.062,32.01 183.129,32.077 183.558,32.077 v1(183.808,31.826)
BP_IO.LVDS_N15: J6.F2 R144.2 | length 56.6
  L1 w0.125: v1(188.8,27.487) 188.726,27.487 188.613,27.6 187.7,27.6 186.9,26.8 186.9,21.66 189.386,19.174 193.313,19.174 195.5,16.987 195.5,4.3 197.6,2.2 197.6,0.8 198.2,0.2 207.946,0.2 208.046,0.3 208.046,0.395 208.046,0.612 207.67,0.988 J6.F2@207.483,0.988
  L6 w0.125: R144.2@180.011,29.147 180.239,29.374 180.239,29.422 180.312,29.495 185.018,29.495 186.913,27.6 188.613,27.6 188.726,27.487 v1(188.8,27.487)
BP_IO.LVDS_P0: J6.D3 R145.1 | length 72.4
  L3 w0.13: v1(199.785,55.779) 199.522,55.516 198.199,55.516 197.27,54.587 197.27,17.292 195.065,15.087 195.065,4.725 196.14,3.651 196.14,2.917 197.163,1.894 209.094,1.894 209.607,2.407 209.607,2.618 209.978,2.988 J6.D3@210.183,2.988
  L6 w0.125: R145.1@198.769,55.893 198.997,55.665 198.997,55.634 199.07,55.56 199.712,55.56 199.785,55.634 v1(199.785,55.779)
BP_IO.LVDS_P1: J6.A3 R146.1 | length 65.9
  L3 w0.13: J6.A3@214.383,2.988 214.178,2.988 213.807,3.359 213.807,3.466 213.807,3.7 213.907,3.8 215.103,3.8 215.549,4.246 215.549,10.403 214.976,10.976 214.976,41.124 214.4,41.7 214.4,48.701 214.525,48.827 v1(214.525,48.9)
  L6 w0.125: R146.1@198.96,52.642 199.187,52.414 199.187,52.344 199.26,52.271 212.117,52.271 214.412,49.975 214.412,49.087 214.525,48.974 v1(214.525,48.9)
BP_IO.LVDS_P2: J6.B4 R147.1 | length 57.7
  L6 w0.125: R147.1@199.087,48.324 199.314,48.096 199.314,48.069 199.387,47.996 199.931,47.996 199.936,47.991 200.713,47.991 201.474,47.23 201.474,40.926 205.8,36.6 212.634,36.6 215.122,34.112 215.122,28.335 215.578,27.879 215.578,6.635 214.794,5.851 212.902,5.851 212.508,5.456 212.508,5.353 212.872,4.988 J6.B4@213.083,4.988
BP_IO.LVDS_P3: J6.K4 R148.1 | length 50.2
  L3 w0.13: v1(199.713,45.9) 199.713,45.827 199.588,45.701 199.588,45.112 200.2,44.5 200.286,44.414 200.949,43.751 200.949,38.482 199.668,37.201 199.668,14.74 197.499,12.571 197.499,6.328 197.596,6.231 199.246,6.231 199.907,5.569 199.907,5.359 200.278,4.988 J6.K4@200.483,4.988
  L6 w0.125: R148.1@199.163,42.151 199.39,42.379 199.39,42.401 199.464,42.474 199.962,42.474 200.374,42.887 200.374,44.513 199.6,45.287 199.6,45.8 199.7,45.9 v1(199.713,45.9)
BP_IO.LVDS_P4: J6.H4 R149.1 | length 47.7
  L3 w0.13: v1(200.1,39.975) 200.1,39.949 200,39.849 198.897,39.849 198.337,39.289 198.337,16.124 196.107,13.893 196.107,5.535 197.748,3.894 203.594,3.894 204.107,4.407 204.107,4.618 204.478,4.988 J6.H4@204.683,4.988
  L6 w0.125: R149.1@199.214,40.196 199.441,39.968 199.441,39.936 199.514,39.863 199.914,39.863 200.026,39.975 v1(200.1,39.975)
BP_IO.LVDS_P5: J6.J5 R150.1 | length 38.2
  L3 w0.13: J6.J5@201.783,6.988 201.578,6.988 201.207,7.359 201.207,7.569 200.576,8.201 198.675,8.201 198.21,8.665 198.21,11.047 201.728,14.565 201.728,36.749 201.664,36.813 201.664,37.304 201.787,37.427 v1(201.787,37.5)
  L6 w0.125: R150.1@199.341,35.928 199.568,36.156 199.568,36.188 199.641,36.261 201.049,36.261 201.674,36.887 201.674,37.4 201.774,37.5 v1(201.787,37.5)
BP_IO.LVDS_P6: J6.G5 R151.1 | length 50.6
  L1 w0.125: J6.G5@205.983,6.988 205.796,6.988 205.42,7.365 205.42,7.468 205.826,7.874 214.935,7.874 215.59,8.53 215.59,20.311 214.734,21.167 214.734,31.094 214.155,31.672 213.947,31.88 v1(213.947,32.235)
  L6 w0.125: R151.1@199.391,32.83 199.619,32.602 199.619,32.563 199.692,32.49 213.321,32.49 213.576,32.235 v1(213.947,32.235)
BP_IO.LVDS_P7: J6.E6 R152.1 | length 34.5
  L3 w0.13: v1(207.9,30.8) 207.973,30.8 208.099,30.675 208.878,30.675 209.103,30.449 209.276,30.276 210.949,28.603 210.949,14.097 208.307,11.455 208.307,9.564 J6.E6@208.883,8.988
  L6 w0.125: R152.1@199.214,29.172 199.214,29.152 199.441,28.925 199.461,28.925 199.535,28.851 201.064,28.851 202.9,30.687 207.713,30.687 207.826,30.8 v1(207.9,30.8)
BP_IO.LVDS_P8: J6.B6 R188.1 | length 86.3
  L3 w0.13: v1(204.118,58.574) 204.118,58.203 204.819,57.501 204.971,57.349 210.003,57.349 212.507,54.845 212.507,9.564 J6.B6@213.083,8.988
  L6 w0.125: R188.1@179.986,55.867 180.213,55.64 180.213,55.608 180.287,55.534 180.438,55.534 180.588,55.684 180.588,56.444 180.981,56.837 180.981,58.933 184.071,62.022 194.298,62.022 196.006,60.314 202.024,60.314 203.413,58.925 203.763,58.574 v1(204.118,58.574)
BP_IO.LVDS_P9: J6.K6 R189.1 | length 83.7
  L3 w0.13: J6.K6@200.483,8.988 199.92,9.551 199.92,10.275 202.993,13.348 202.993,24.241 204.449,25.697 204.449,54.449 205.425,55.425 206.101,55.425 206.227,55.3 v1(206.3,55.3)
  L6 w0.125: R189.1@179.96,50.025 180.188,50.253 180.188,50.285 180.261,50.358 181.746,50.358 182.774,51.387 182.774,55.087 186.687,59 199.8,59 203.387,55.413 206.113,55.413 206.226,55.3 v1(206.3,55.3)
BP_IO.LVDS_P10: J6.H6 R190.1 | length 84.3
  L3 w0.13: J6.H6@204.683,8.988 204.107,9.564 204.107,10.2 206.1,12.193 206.1,31.2 207.749,32.849 207.749,53.4 207.849,53.5 v1(207.875,53.5)
  L6 w0.125: R190.1@179.846,47.719 179.846,47.699 180.146,47.399 182.099,47.399 184.3,49.6 184.3,54.787 187.787,58.274 199.526,58.274 203.4,54.4 207.4,54.4 207.761,54.039 207.761,53.687 207.875,53.574 v1(207.875,53.5)
BP_IO.LVDS_P11: J7.D1 R156.1 | length 57.7
  L1 w0.125: v1(186.78,43.701) 186.78,43.704 186.572,43.912 186.572,45.021 185.929,45.665 185.929,62.058 195.351,71.481 207.651,71.481 209.612,73.441 209.612,74.779 209.62,74.787 209.62,75.425 J7.D1@210.183,75.988
  L6 w0.125: R156.1@179.948,41.821 180.175,42.049 180.175,42.081 180.249,42.154 180.558,42.154 180.824,42.42 180.824,42.612 181.166,42.953 185.004,42.953 185.301,43.251 186.279,43.251 186.517,43.488 186.517,43.52 186.59,43.593 186.598,43.593 186.706,43.701 v1(186.78,43.701)
BP_IO.LVDS_P12: J7.A1 R157.1 | length 65.6